# Altium PCB XUF208_IO.PcbDoc
Units mil, origin at the board's own origin, x right, y up, seen from the top; angles counter-clockwise.
Board outline 1259.84 x 1909.45 mil, 2 copper layers (Top Layer, Bottom Layer); 18 components, 14 nets, 67 pads, 12 vias.
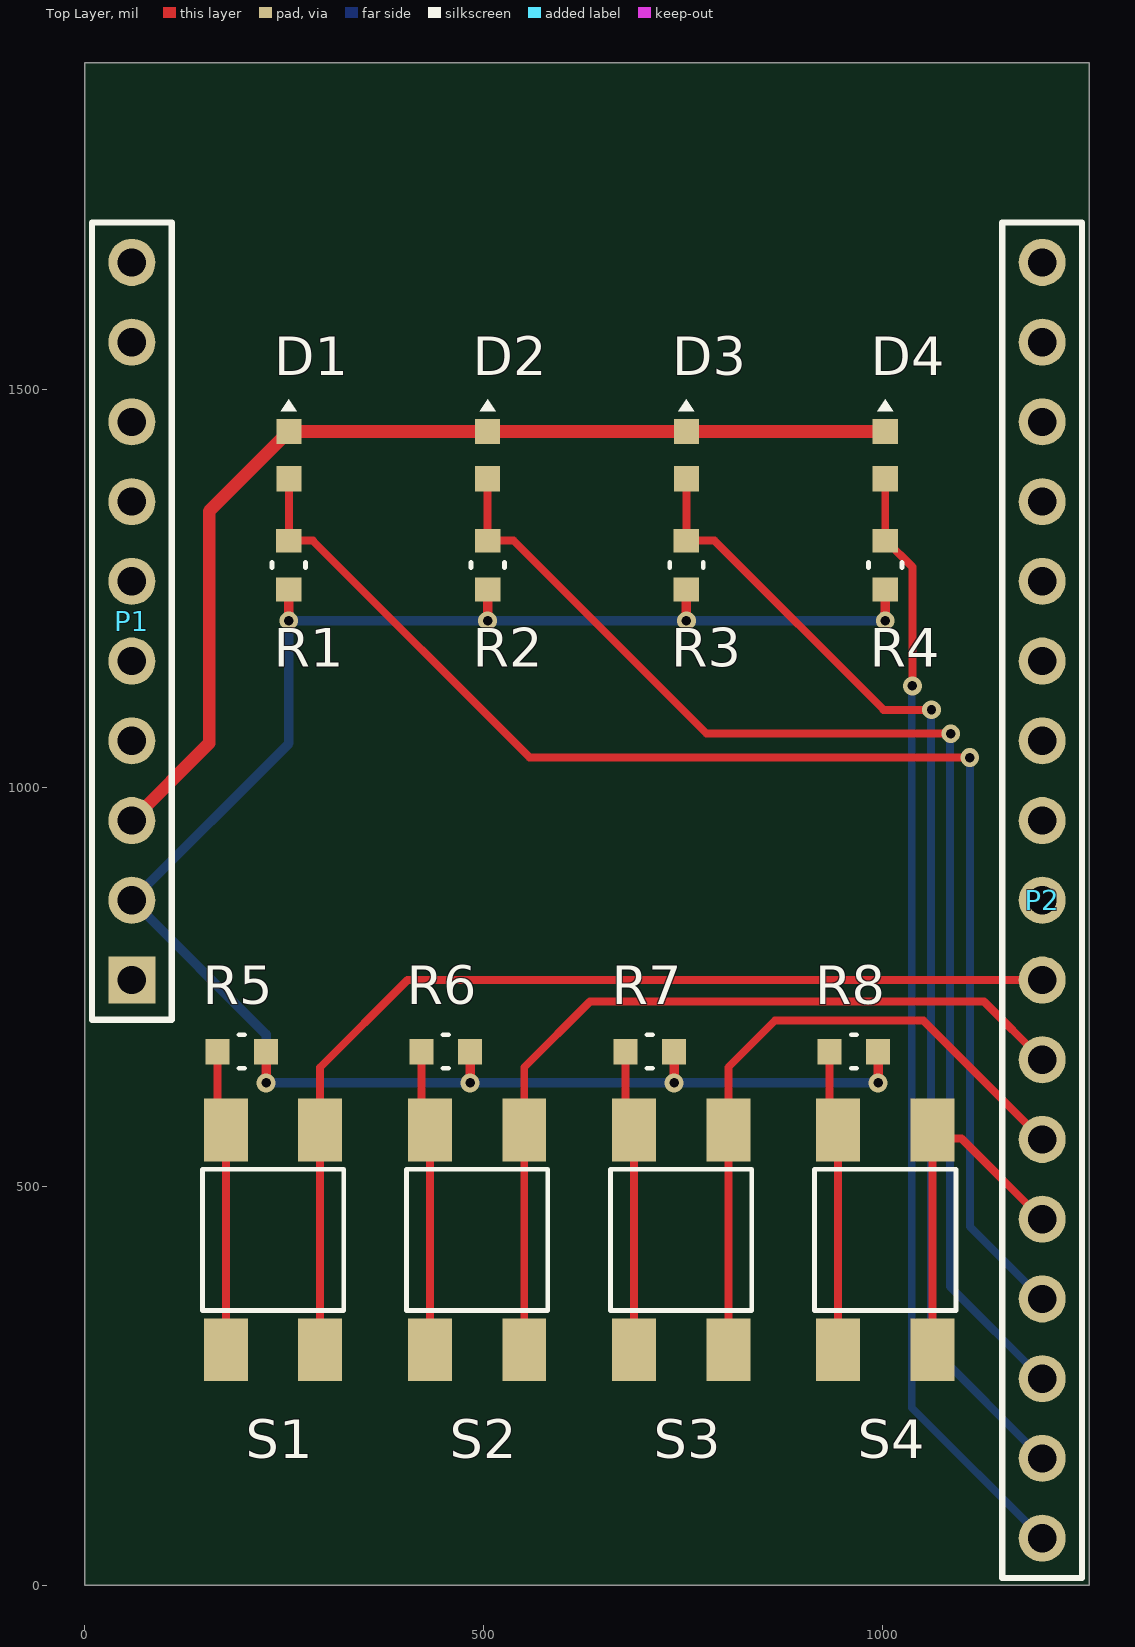
[diagram p0: Top Layer view]
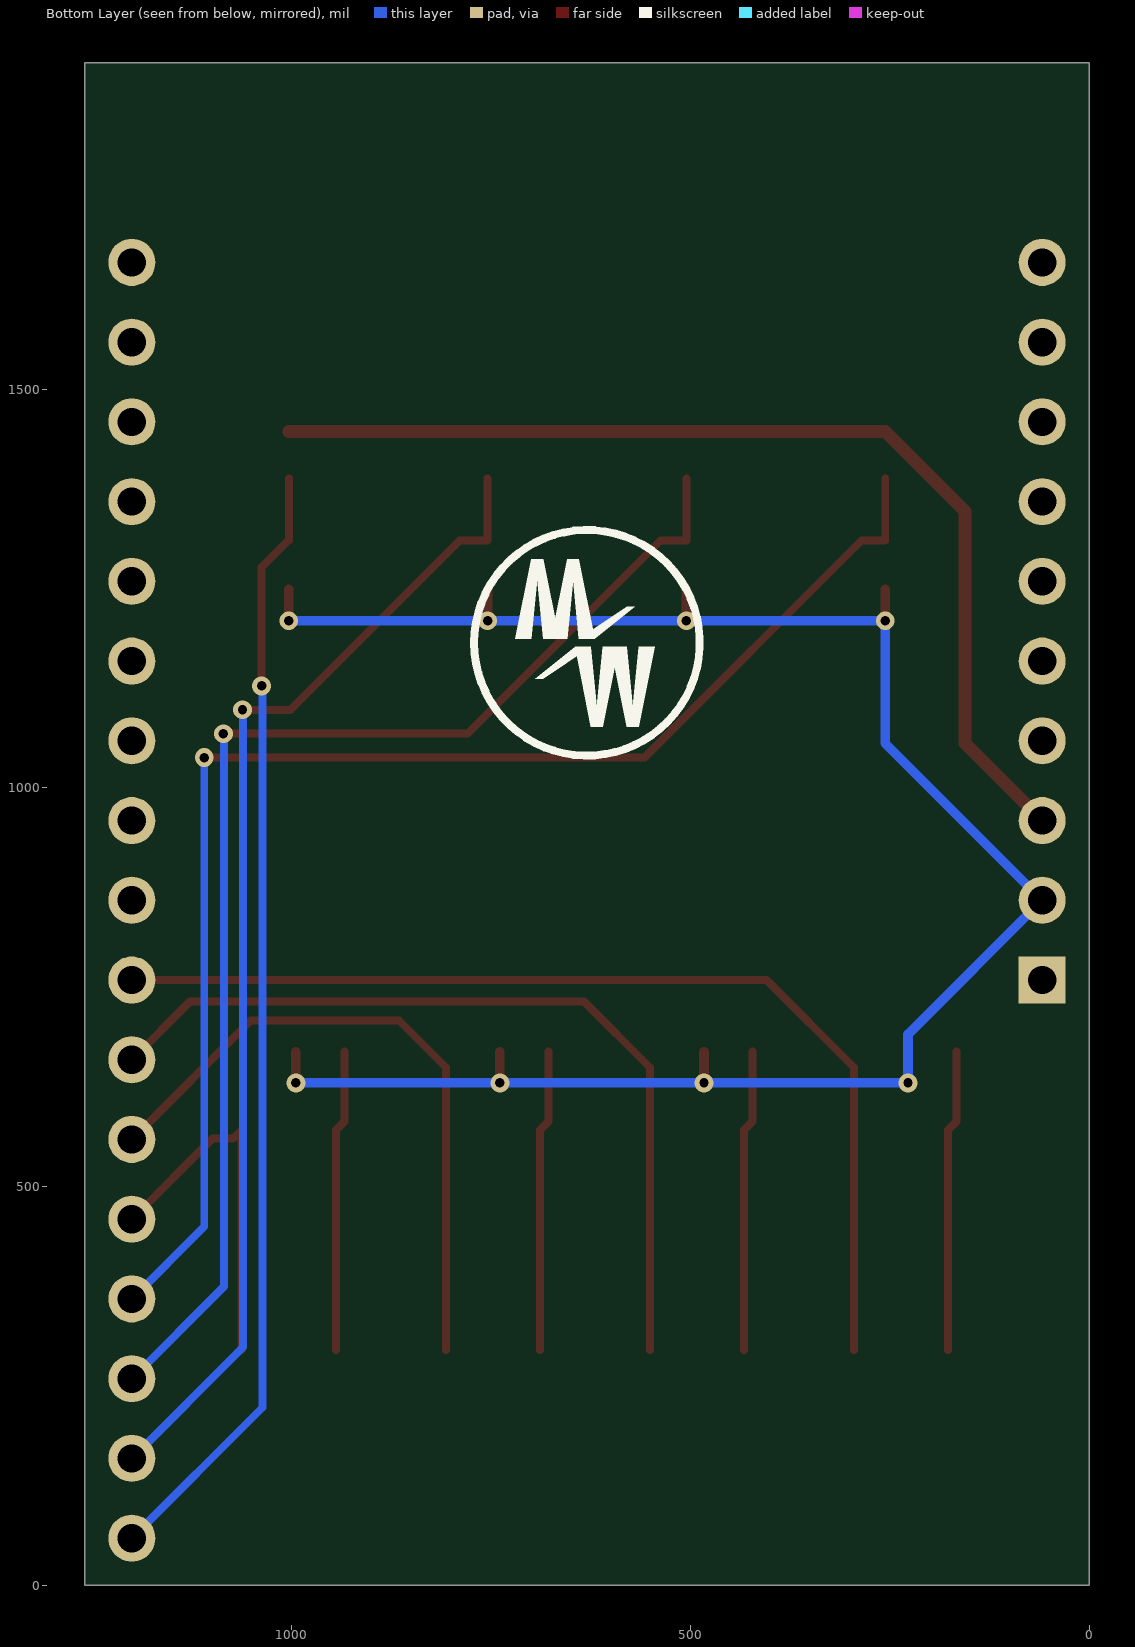
[diagram p1: Bottom Layer view, seen from below]
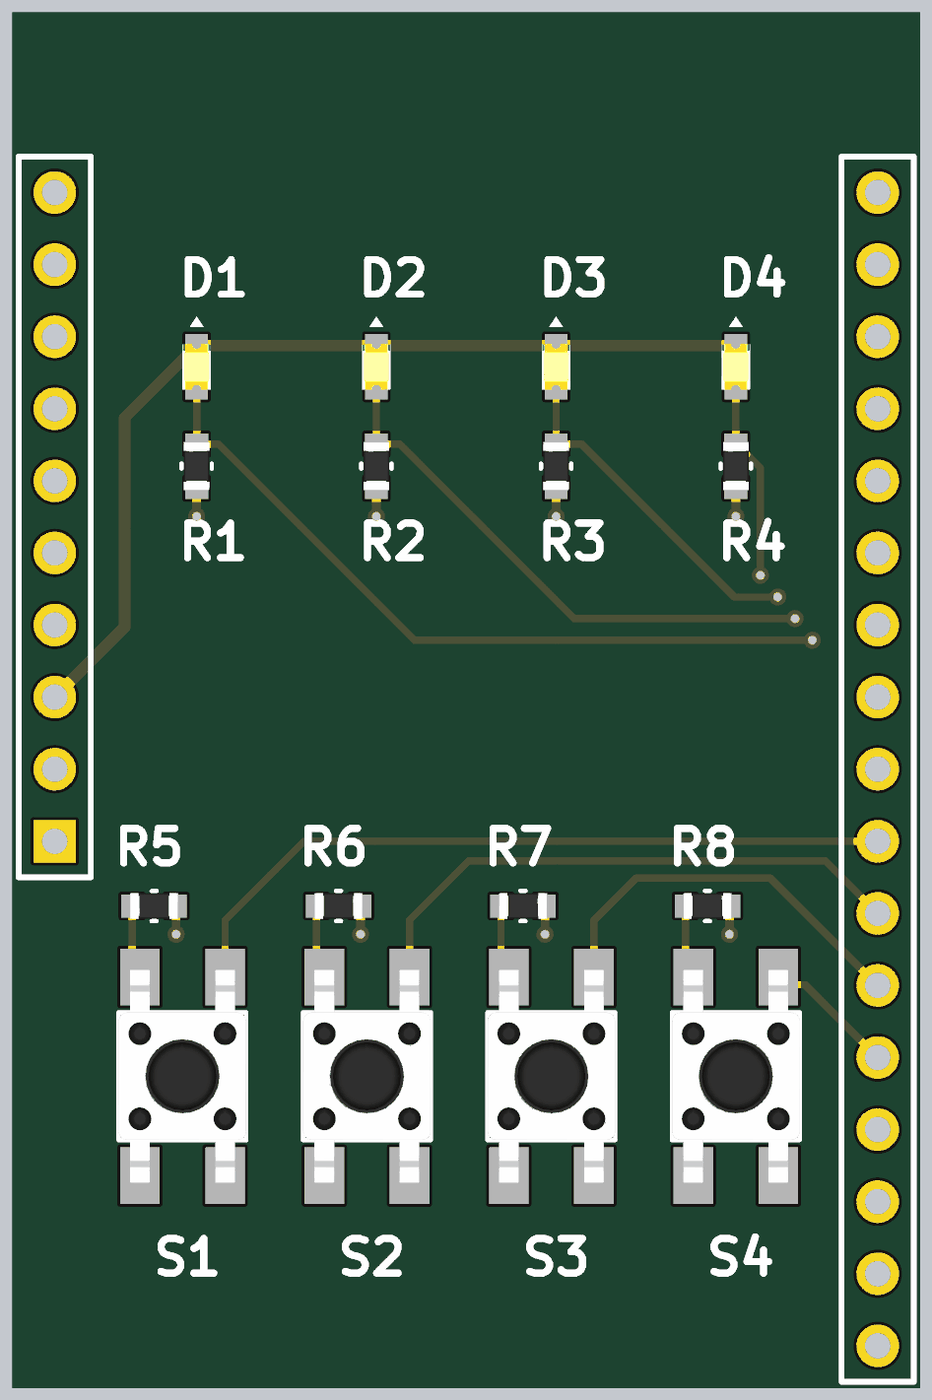
[diagram p2: 3D render of the assembled board from above, using the file's embedded part models]

## Layer stack, top to bottom
Top Solder: solder mask 0.4, Solder Resist, Dk 3.5
Top Layer: signal copper 1.4
Dielectric 1: dielectric 12.6, FR-4, Dk 4.8
Bottom Layer: signal copper 1.4
Bottom Solder: solder mask 0.4, Solder Resist, Dk 3.5

## Board outline
0,0 0,1909.45 1259.84,1909.45 1259.84,0

## Design rules (kind name [scope] priority, off if disabled: settings)
BoardOutlineClearance [All] p1: gap=7.87 ignorepadtopadclearanceinfootprint=FALSE except(15.75: Arc-SplitBarrior Arc-SplitContinuation Track-SplitBarrior Track-SplitContinuation SMDPad-SplitBarrior SMDPad-SplitContinuation THPad-SplitBarrior THPad-SplitContinuation Via-SplitBarrior Via-SplitContinuation Fill-SplitBarrior Fill-SplitContinuation Poly-SplitBarrior Poly-SplitContinuation Region-SplitBarrior Region-SplitContinuation Text-SplitBarrior Text-SplitContinuation)
Clearance "Clearance Bottom Layer" [OnLayer('Bottom Layer')] p1: gap=8 ignorepadtopadclearanceinfootprint=TRUE except(10: Arc-Text Track-Text SMDPad-Text THPad-Text Via-Text Fill-Text Poly-Text Region-Text Text-Text)
Clearance "Clearance Top Layer" [OnLayer('Top Layer')] p2: gap=8 ignorepadtopadclearanceinfootprint=TRUE except(10: Arc-Text Track-Text SMDPad-Text THPad-Text Via-Text Fill-Text Poly-Text Region-Text Text-Text)
Clearance [All] p3: gap=7.87 ignorepadtopadclearanceinfootprint=FALSE except(3.5: Arc-Arc Arc-Track Arc-SMDPad Track-Track Track-SMDPad SMDPad-SMDPad; 5: Arc-Via Track-Via SMDPad-Via THPad-Via Via-Via; 10: Arc-Text Track-Text SMDPad-Text THPad-Text Via-Text Fill-Text Poly-Text Region-Text Text-Text)
HoleSize [All] p1: absolutevalues=TRUE maxlimit=248.03 minlimit=7.87 maxpercent=80.000 minpercent=20.000
MinimumAnnularRing [All] p1: minimumring=3
MinimumSolderMaskSliver [All] p1: minsoldermaskwidth=3.94
PolygonConnect PolygonConnect_1 [All] p1: thpad.connectstyle=Relief thpad.reliefconductorwidth=20 thpad.reliefentries=4 thpad.polygonreliefangle="90 Angle" thpad.airgapwidth=10 smdpad.connectstyle=Relief smdpad.reliefconductorwidth=20 smdpad.reliefentries=4 smdpad.polygonreliefangle="90 Angle" smdpad.airgapwidth=10 via.connectstyle=Direct via.reliefconductorwidth=20 via.reliefentries=4 via.polygonreliefangle="90 Angle" via.airgapwidth=10
RoutingCorners [All] p1: cornerstyle=Round minsetback=100 maxsetback=100
RoutingVias [All] p1: holewidth=19.68 width=39.37 viastyle="Through Hole" minholewidth=7.87 minwidth=17.72 maxholewidth=39.37 maxwidth=78.74
SilkToSilkClearance [All] p1: silktosilkclearance=3.94
SilkToSolderMaskClearance [IsPad] p1: minsilkscreentomaskgap=3.94 clearancetoexposedcopper=TRUE
SolderMaskExpansion [All] p1: expansion=4 istentingtop=FALSE
Width [All] p1: maxlimit=100 minlimit=3.5 preferedwidth=15
25 further rules are at their usual default settings.

## Components (designator, comment, footprint, x,y, rotation, side; value= is the part's Value field where it differs from the comment)
D1 "LED" 0603_YELLOW 255.91,1417.32 r90 top
D2 "LED" 0603_YELLOW 505.25,1417.32 r90 top
D3 "LED" 0603_YELLOW 754.59,1417.32 r90 top
D4 "LED" 0603_YELLOW 1003.94,1417.32 r90 top
P1 "Header 10" HDR1X10 59.06,759.06 r90 top
P2 "Header 17" HDR1X17 1200.79,1659.06 r270 top
R1 "RES" RC0603N 255.91,1279.53 r270 top value=1K
R2 "RES" RC0603N 505.25,1279.53 r270 top value=1K
R3 "RES" RC0603N 754.59,1279.53 r270 top value=1K
R4 "RES" RC0603N 1003.94,1279.53 r270 top value=1K
R5 "RES" RC0603N 196.85,669.29 r180 top value=10K
R6 "RES" RC0603N 452.76,669.29 r180 top value=10K
R7 "RES" RC0603N 708.66,669.29 r180 top value=10K
R8 "RES" RC0603N 964.57,669.29 r180 top value=10K
S1 "Tact Switch SPST" TS_SPST_W4.5XD4.5 236.22,433.07 r270 top
S2 "Tact Switch SPST" TS_SPST_W4.5XD4.5 492.13,433.07 r270 top
S3 "Tact Switch SPST" TS_SPST_W4.5XD4.5 748.03,433.07 r270 top
S4 "Tact Switch SPST" TS_SPST_W4.5XD4.5 1003.94,433.07 r270 top

## Footprints (in the part's own frame and the unit in brackets; to place one, negate y for a bottom-side part, rotate by r counter-clockwise, add the part's x,y. Pads: shape width x height; smd on the part's side, far side on the other; paste and mask are expansions set on the pad)
0603_YELLOW [mm]
  rect 0.8x0.8 smd: 1(-0.75,0) 2(0.75,0)
  silkscreen extent 1.4,-0.25 1.78,0.25, body extent -0.81,-0.5 0.81,0.5, height 0.88
HDR1X10 [mm] "Connector; Header; 10 Position"
  rect 1.5x1.5 hole 0.9: 1(0,0)
  round 1.5 hole 0.9: 2(2.54,0) 3(5.08,0) 4(7.62,0) 5(10.16,0) 6(12.7,0) 7(15.24,0) 8(17.78,0) 9(20.32,0) 10(22.86,0)
  silkscreen extent -1.27,-1.27 24.13,1.27
HDR1X17 [mm] "Connector; Header; 17 Position"
  round 1.5 hole 0.9: 1(0,0) 2(2.54,0) 3(5.08,0) 4(7.62,0) 5(10.16,0) 6(12.7,0) 7(15.24,0) 8(17.78,0) 9(20.32,0) 10(22.86,0) 11(25.4,0) 12(27.94,0) 13(30.48,0) 14(33.02,0) 15(35.56,0) 16(38.1,0) 17(40.64,0)
  silkscreen extent -1.27,-1.27 41.91,1.27
RC0603N [mil]
  rect 30x32 smd: 1(-30.5,0) 2(30.5,0)
  silkscreen extent -3,-21 3,21, body extent -33,-18 33,18, height 22
TS_SPST_W4.5XD4.5 [mm]
  rect 2x1.4 smd: 1(-3.5,1.5) 1(3.5,1.5) 2(-3.5,-1.5) 2(3.5,-1.5)
  silkscreen extent -2.25,-2.25 2.25,2.25, body extent -3.75,-2.25 3.75,2.25, height 4.2

## Part data
D1 D2 D3 D4: "LED Emitters", ForwardVoltage=2V
P1: "Header, 10-Pin", LatestRevisionDate=17-Jul-2002, LatestRevisionNote="Re-released for DXP Platform.", Publisher="Altium Limited"
P2: "Header, 17-Pin", LatestRevisionDate=17-Jul-2002, LatestRevisionNote="Re-released for DXP Platform.", Publisher="Altium Limited"
R1 R2 R3 R4 R5 R6 R7 R8: "Chip Resistors", PowerRating=0.25W
S1 S2 S3 S4: "Switch"

## Via types
v1: diameter 23.62, hole 11.81, Top Layer to Bottom Layer, tented both sides, 12 vias

## Nets (pads, with @x,y where several pads share a name; then routed paths per layer and width w, separated by ;. In a path a pad name is that pad's centre, name@x,y a point inside that pad or via, vN(x,y) a via of type N, cw(c..) or ccw(c..) an arc to the next point about the centre after c; other vN are vias at no path point)
3V3: P1.2 R1.2 R2.2 R3.2 R4.2 R5.1 R6.1 R7.1 R8.1 | length 2561.1
  Top Layer w12: v1(227.35,630) R5.1 ; v1(255.91,1209.74) R1.2 ; v1(483.26,630) R6.1 ; v1(505.25,1209.74) R2.2 ; v1(739.16,630) R7.1 ; v1(754.59,1209.74) R3.2 ; v1(995.07,630) R8.1 ; v1(1003.94,1209.74) R4.2
  Bottom Layer w12: v1(995.07,630) v1(739.16,630) v1(483.26,630) v1(227.35,630) 227.35,690.76 P1.2 255.91,1055.91 v1(255.91,1209.74) v1(505.25,1209.74) v1(754.59,1209.74) v1(1003.94,1209.74)
BUTTON_1: P2.10 S1.1 | length 1305.2
  Top Layer w10: S1.1@295.28,295.28 295.28,570.87 295.28,649.61 404.72,759.06 P2.10
BUTTON_2: P2.11 S2.1 | length 1068.3
  Top Layer w10: S2.1@551.18,295.28 551.18,570.87 551.18,649.61 633.57,732 1127.84,732 P2.11
BUTTON_3: P2.12 S3.1 | length 833.9
  Top Layer w10: S3.1@807.09,295.28 807.09,570.87 807.09,649.61 865.48,708 1051.84,708 P2.12
BUTTON_4: P2.13 S4.1 | length 459.7
  Top Layer w10: S4.1@1062.99,295.28 1062.99,559.06 1062.99,570.87 1073.71,560.15 1099.69,560.15 P2.13
GND: D1.2 D2.2 D3.2 D4.2 P1.3 | length 1317.4
  Top Layer w16: P1.3 156,1056 156,1346.94 D1.2 D2.2 D3.2 D4.2
LED_1: D1.1 P2.14 R1.1 | length 1761.1
  Top Layer w10: D1.1 R1.1 285.97,1310.03 558,1038 v1(1110,1038)
  Bottom Layer w10: v1(1110,1038) 1110,449.84 P2.14
LED_2: D2.1 P2.15 R2.1 | length 1615.9
  Top Layer w10: D2.1 R2.1 537.97,1310.03 780,1068 v1(1086,1068)
  Bottom Layer w10: v1(1086,1068) 1085.19,1067.19 1085.19,374.65 P2.15
LED_3: D3.1 P2.16 R3.1 | length 1470.1
  Top Layer w10: D3.1 R3.1 789.97,1310.03 1002,1098 v1(1062,1098)
  Bottom Layer w10: v1(1062,1098) 1061.19,1097.19 1061.19,298.65 P2.16
LED_4: D4.1 P2.17 R4.1 | length 1411.5
  Top Layer w10: D4.1 R4.1 1004.94,1310.03 1038,1276.96 v1(1038,1128)
  Bottom Layer w10: v1(1038,1128) 1037.19,1127.19 1037.19,222.65 P2.17
NetR5_2: R5.2 S1.2 | length 378.5
  Top Layer w10: R5.2 166.35,581.68 177.17,570.87 S1.2@177.17,295.28
NetR6_2: R6.2 S2.2 | length 378.5
  Top Layer w10: R6.2 422.26,581.68 433.07,570.87 S2.2@433.07,295.28
NetR7_2: R7.2 S3.2 | length 378.5
  Top Layer w10: R7.2 678.16,581.68 688.98,570.87 S3.2@688.98,295.28
NetR8_2: R8.2 S4.2 | length 378.5
  Top Layer w10: R8.2 934.07,581.68 944.88,570.87 S4.2@944.88,295.28
pads on no net: P1.1 P1.4 P1.5 P1.6 P1.7 P1.8 P1.9 P1.10 P2.1 P2.2 P2.3 P2.4 P2.5 P2.6 P2.7 P2.8 P2.9

## Silkscreen, mask and mechanical layers (free items; w line width, h text height)
Bottom Overlay:
  circle w10: c630,1182 r141.51
  region: 545,1177 565,1077 575,1077 565,1177
  region: 600,1177 580,1077 570,1077 580,1177
  region: 590,1177 610,1077 620,1077 610,1177
  region: 645,1177 625,1077 615,1077 625,1177
  region: 625,1177 685,1137 695,1137 645,1177
  region: 640,1187 580,1227 570,1227 620,1187
  region: 620,1187 640,1287 650,1287 640,1187
  region: 675,1187 655,1287 645,1287 655,1187
  region: 665,1187 685,1287 695,1287 685,1187
  region: 720,1187 700,1287 690,1287 700,1187
Mechanical 1:
  the board outline again, w0.5